# Allegro board interface.brd
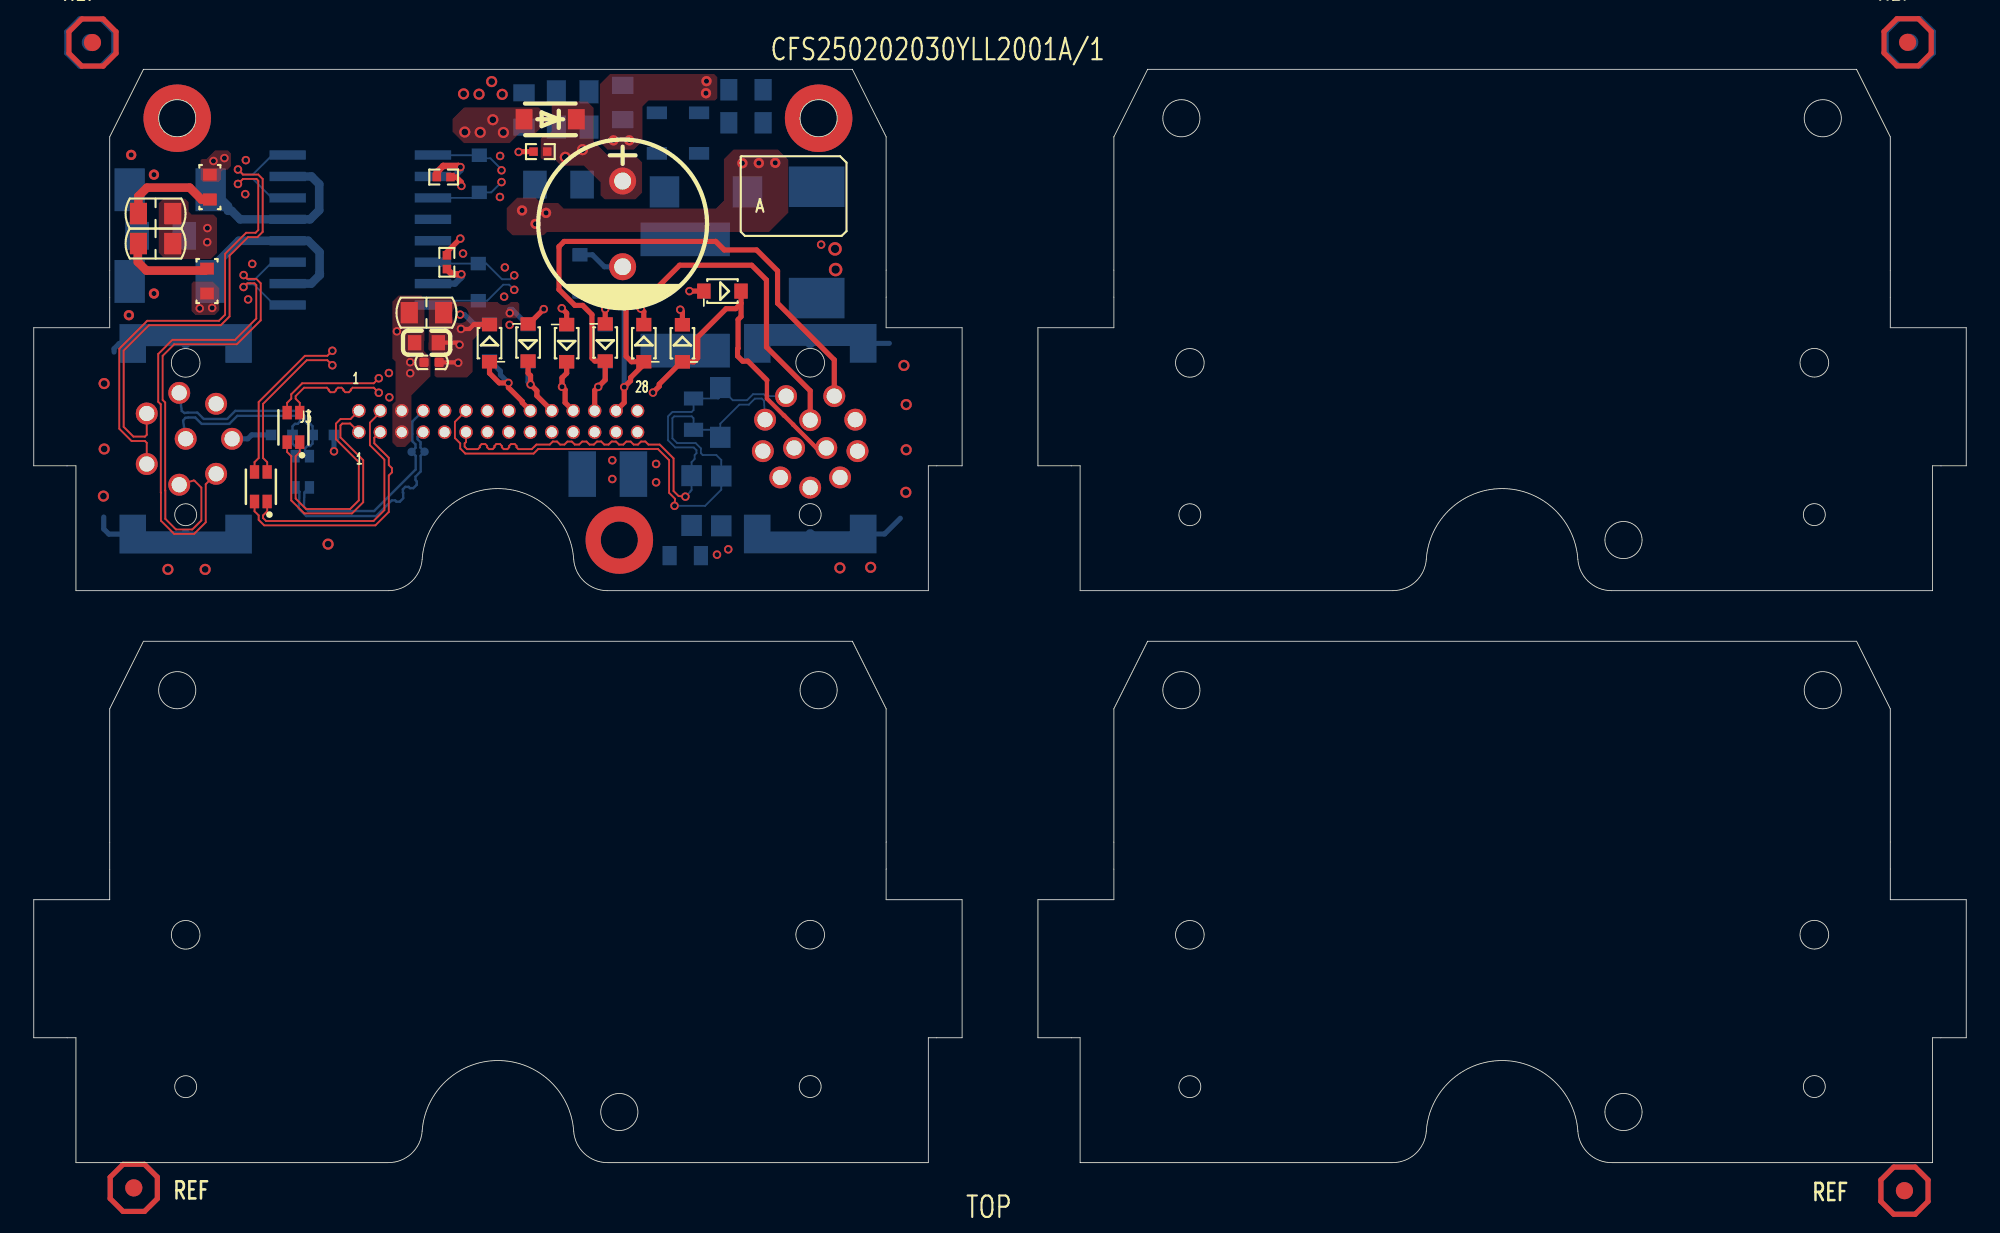
[diagram p0: board, top side]
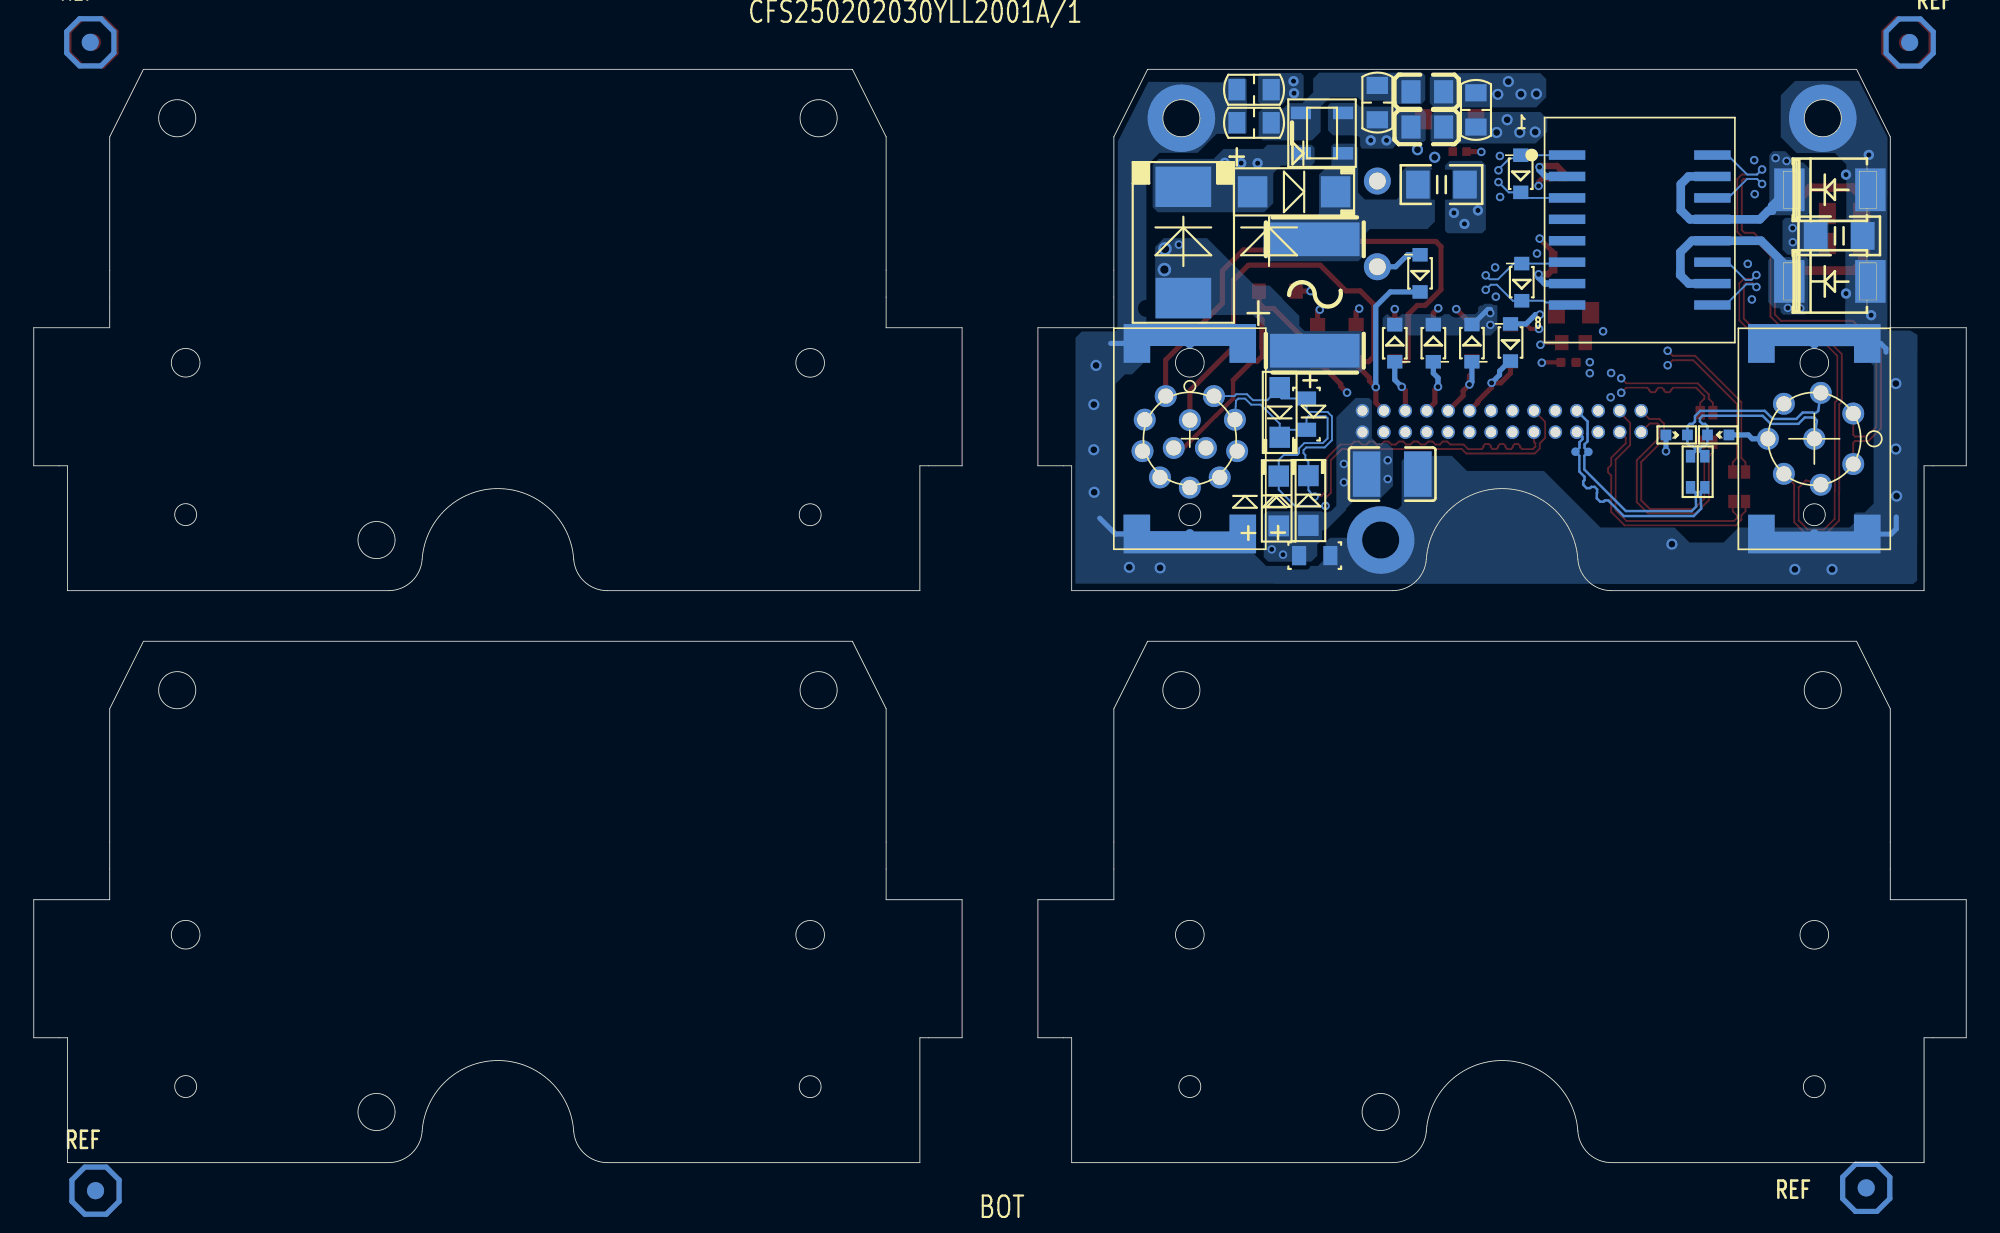
[diagram p1: board, bottom side, seen from below]

Outline 114.49 x 64.8 mm; copper layers: TOP, L2, L3, L4, L5, BOTTOM. Coordinates in mm from the lower left corner of the outline.
Outline path: circle c8.5,61.9 r1.1 ; circle c8.5,28 r1.1 ; circle c9,13.5 r0.85 ; circle c9,4.5 r0.65 ; circle c34.69,3 r1.1 ; circle c46,13.51 r0.85 ; circle c46,4.51 r0.65 ; circle c46.5,61.9 r1.1 ; circle c46.5,28 r1.1 ; circle c67.99,61.9 r1.1 ; circle c67.99,28 r1.1 ; circle c68.49,47.4 r0.85 ; circle c68.49,38.4 r0.65 ; circle c68.49,13.5 r0.85 ; circle c68.49,4.5 r0.65 ; circle c94.19,36.9 r1.1 ; circle c94.19,3 r1.1 ; circle c105.49,47.41 r0.85 ; circle c105.49,38.41 r0.65 ; circle c105.49,13.51 r0.85 ; circle c105.49,4.51 r0.65 ; circle c105.99,61.9 r1.1 ; circle c105.99,28 r1.1 ; 0,49.48 4.5,49.48 4.5,60.8 6.5,64.8 48.5,64.8 50.5,60.8 50.5,49.48 55,49.48 55,41.3 53,41.3 53,33.9 33.98,33.9 arc(32.62,34.44) 31.99,35.76 arc(27.5,39.95) 23.01,35.76 arc(22.38,34.44) 21.02,33.9 2.5,33.9 2.5,41.3 0,41.3 0,49.48 ; 0,15.58 4.5,15.58 4.5,26.9 6.5,30.9 48.5,30.9 50.5,26.9 50.5,15.58 55,15.58 55,7.4 53,7.4 53,0 33.98,0 arc(32.62,0.54) 31.99,1.86 arc(27.5,6.05) 23.01,1.86 arc(22.38,0.54) 21.02,0 2.5,0 2.5,7.4 0,7.4 0,15.58 ; 59.49,49.48 63.99,49.48 63.99,60.8 65.99,64.8 107.99,64.8 109.99,60.8 109.99,49.48 114.49,49.48 114.49,41.3 112.49,41.3 112.49,33.9 93.48,33.9 arc(92.11,34.44) 91.48,35.76 arc(86.99,39.95) 82.5,35.76 arc(81.87,34.44) 80.51,33.9 61.99,33.9 61.99,41.3 59.49,41.3 59.49,49.48 ; 59.49,15.58 63.99,15.58 63.99,26.9 65.99,30.9 107.99,30.9 109.99,26.9 109.99,15.58 114.49,15.58 114.49,7.4 112.49,7.4 112.49,0 93.48,0 arc(92.11,0.54) 91.48,1.86 arc(86.99,6.05) 82.5,1.86 arc(81.87,0.54) 80.51,0 61.99,0 61.99,7.4 59.49,7.4 59.49,15.58

## Design rules (mm)
constraint set DEFAULT: min track width 0.152, pair gap 0.127
net group GND_FIELD SIGNAL: nets N20727291 N20727344
net group MDI0+: nets MDI0+ MDI_A0+
net group MDI0-: nets MDI0- MDI_A0-
net group MDI1+: nets MDI1+ MDI_A1+
net group MDI1-: nets MDI1- MDI_A1-
net group OTG_DM: nets OTG_DM OTG_USB_DM_PORT
net group OTG_DP: nets OTG_DP OTG_USB_DP_PORT
net group ETH_CON1: nets MDI0+CON MDI0-CON MDI1+CON MDI1-CON
net group GIO: nets BJ_IN1 BJ_IN2 BJ_IN3 BJ_OUT1 BJ_OUT2 BJ_OUT3

## Placement (name value [footprint] x y rotation side)
C1  4.7uF/35V  [C0603]  23.27 48.6 180 top
C2  100nF  [C0402]  23.57 47.43 180 top
C3  22uF/35V  [C0805]  23.27 50.38 180 top
C4  1nF/2KV  [C1206]  7.52 54.93 0 bottom
C5  1nF  [C0805]  7.22 54.48 0 top
C6  1nF  [C0805]  7.22 56.25 0 top
C13  10uF/50V  [C1206]  31.09 57.97 180 bottom
C19  22uF/35V  [C0805]  29.05 62.39 90 bottom
C22  100nF  [SC0402]  24.28 58.41 0 top
C23  100nF  [SC0402]  24.48 53.37 90 top
C24  1nF/2KV  [C1210]  34.01 40.81 0 bottom
C30  22uF/35V  [C0805]  34.89 62.83 90 bottom
C31  1nF/1KV  [C0805]  42.2 63.59 0 bottom
C32  1nF/1KV  [C0805]  42.2 61.63 0 bottom
C33  100nF  [SC0402]  30.01 59.92 180 top
C35  220uF  [CAP-TH_BD10_0-P5_00-D1_0-FD]  34.89 55.64 270 top
D1  SD30CW  [SOD_323O]  33.86 48.61 270 top
D2  SD30CW  [SOD_323O]  32.36 52.71 270 bottom
D3  SD30CW  [SOD_323O]  40.8 51.66 0 top
D4  SD30CW  [SOD_323O]  29.29 48.61 270 top
D5  SD30CW  [SOD_323O]  27 48.61 270 bottom
D6  SD30CW  [SOD_323O]  31.57 48.57 270 top
D8  SD30CW  [SOD_323O]  33.86 48.56 90 bottom
D9  SD30CW  [SOD_323O]  36.14 48.57 90 top
D10  SD30CW  [SOD_323O]  38.43 48.56 90 top
D11  SD30CW  [SOD_323O]  27 48.57 90 top
D12  SD30CW  [SOD_323O]  29.29 48.57 90 bottom
D13  SD30CW  [SOD_323O]  31.57 48.57 90 bottom
ED1  BV-FA05UA  [ESD0402]  15.33 43.08 180 bottom
ED2  BV-FA05UA  [ESD0402]  16.52 43.18 0 bottom
ED3  SMA  [SOD_123]  40.67 44.47 90 bottom
ED4  SJD12C6.5L01  [SOD_123]  38.97 39.24 270 bottom
ED5  SJD12C6.5L01  [SOD_123]  40.73 39.22 270 bottom
F4  2920L300/36GR  [F2920]  38.59 51.43 90 bottom
FB1  SCM4015-102Y  [CMF_SCM4015_4_0X4_0]  38.17 61.02 90 bottom
FB2  SDCW2012-2-900TF  [D2012]  15.91 40.95 90 bottom
FB3  BTREF2012A3R601  [L0805]  31.93 61.38 180 bottom
FB4  BTREF2012A3R601  [L0805]  31.93 63.47 180 bottom
J3  GPEB241-1402A006C1BC  [HDR_TH_28P2X14_P1_27]  27.52 43.93 0 top
L2  SCM2012-121-04  [FILTER-SMD_4P-L2_0-W1_2-BL-1]  15.39 43.58 90 top
L3  SCM2012-121-04  [FILTER-SMD_4P-L2_0-W1_2-BL-1]  13.46 40.06 90 top
R3  75R  [SR0603]  10.27 52.25 90 top
R4  75R  [SR0603]  10.43 57.82 270 top
R16  120R/5%  [R0805]  39.09 44.36 90 bottom
R20  30MR  [R0805]  38.6 35.98 180 bottom
REF  -  [unnamed]  110.83 -1.66 0 top
REF#2  -  [unnamed]  3.48 66.39 0 top
REF#3  -  [unnamed]  5.93 -1.5 0 top
REF#4  -  [unnamed]  111.02 66.4 0 top
REF#5  -  [unnamed]  110.83 -1.66 180 bottom
REF#6  -  [unnamed]  5.93 -1.5 180 bottom
REF#7  -  [unnamed]  111.15 66.4 180 bottom
REF#8  -  [unnamed]  3.35 66.39 180 bottom
TP2  TP_0.5  [TP_0R50]  23.15 42.14 135 bottom
TP3  TP_0.5  [TP_0R50]  22.38 42.13 135 bottom
TV1  BTRTP0080TA  [SMBF]  8.08 52.23 0 bottom
TV2  BTRTP0080TA  [SMBF]  8.08 57.66 0 bottom
TV8  RBR1MM60ATR  [SOD-123FL]  30.6 61.84 180 top
TV9  BTR3S23Y08  [SOD_323O]  26.33 52.19 270 bottom
TV11  BTRSD33C302  [SMC]  46.38 54.54 270 bottom
TV12  BTRSA33C401  [SMA]  39.82 57.54 0 bottom
TV13  BTR3S23Y08  [SOD_323O]  26.4 58.61 270 bottom
U2  BT16A18  [MS10232]  19.34 55.27 180 bottom
U4  m12-thr-p12  [M12-THR-P12]  46 42.91 90 bottom
U5  m12-thr-s8  [M12-THR-S8]  9 42.9 270 bottom

## Library data of the parts
C1 = CAP NP: signal model: DEFAULT_CAPACITOR_4.7e+06pF_2_1
C2 C22 C23 = CAP NP: signal model: DEFAULT_CAPACITOR_100000pF_2_1
C3 = CAP NP: signal model: DEFAULT_CAPACITOR_2.2e+07pF_2_1
C4-C6 C24 = CAP NP: signal model: DEFAULT_CAPACITOR_1000pF_2_1
C13 C19 = CAP NP: signal model: DEFAULT_CAPACITOR_1e+07pF_2_1
C30-C33 = CAP NP
C35 = KM227M050G13RR0VH2FP0_C3
D1-D6 D8-D13 = DIODE_1: User Part Number: PARTNUM*; room: CHG
ED1-ED5 = DIODE BI_DIR TRIG
F4 = FUSE: signal model: DEFAULT_RESISTOR_2920.3OHM_2_1
FB1 = INDUCTOR COM_1
FB2 = INDUCTOR COM: signal model: INDUCTOR_COM_D2012_SDCW2012-2-900TF_SDCW2012-2-900TF
FB3 FB4 = Inductor
J3 = 5962-87786_0
L2 L3 = SCM2012-121-04_U1: signal model: SCM2012-121-04_SCM2012-121-04
R3 R4 = RESISTOR: signal model: DEFAULT_RESISTOR_75.000000OHM_2_1
R16 = RESISTER: signal model: DEFAULT_RESISTOR_120.000000OHM_2_1
R20 = RESISTOR
TP2 TP3 = TP
TV1 TV2 TV11 TV12 = TVS_S
TV8 = DIODE TVS_0
TV9 TV13 = TVS_S: User Part Number: PARTNUM*
U2 = LAN1102: User Part Number: PARTNUM*
U4 = JK_CON2_2
U5 = JK_CON3_0

## Footprints (pads in the part's own frame, mm; a bottom-side part is the same pattern mirrored in y, then rotated)
C0402
  custom 0.55x0.55 smd: 1(-0.45,0) 2(0.45,0)
C0603
  rect 0.8x0.9 smd: 1(-0.7,0) 2(0.7,0)
C0805
  rect 1.016x1.27 smd: 1(-1.016,0) 2(1.016,0)
C1206
  rect 1.397x1.651 smd: 1(-1.397,0) 2(1.397,0)
C1210
  rect 1.635x2.7 smd: 1(-1.517,0) 2(1.517,0)
CAP-TH_BD10_0-P5_00-D1_0-FD
  round 1.6 hole 1: 1(-2.54,0) 2(2.54,0)
CMF_SCM4015_4_0X4_0
  rect 0.75x1.2 smd: 1(-1.2,1.25) 2(1.2,1.25) 3(1.2,-1.25) 4(-1.2,-1.25)
D2012
  rect 0.749x0.549 smd: 1(-0.925,-0.424) 2(0.925,-0.424) 3(-0.925,0.424) 4(0.925,0.424)
ESD0402
  rect 0.635x0.635 smd: 1(0,0.051) 2(1.27,0.051)
F2920
  rect 2x5.3 smd: 1(-3.3,0) 2(3.3,0)
FILTER-SMD_4P-L2_0-W1_2-BL-1
  rect 0.8x0.55 smd: 1(-0.875,-0.375) 2(0.875,-0.375) 3(0.875,0.375) 4(-0.875,0.375)
HDR_TH_28P2X14_P1_27
  round 0.8 hole 0.6: 1(-8.255,-0.635) 2(-8.255,0.635) 3(-6.985,-0.635) 4(-6.985,0.635) 5(-5.715,-0.635) 6(-5.715,0.635) 7(-4.445,-0.635) 8(-4.445,0.635) 9(-3.175,-0.635) 10(-3.175,0.635) 11(-1.905,-0.635) 12(-1.905,0.635) 13(-0.635,-0.635) 14(-0.635,0.635) 15(0.635,-0.635) 16(0.635,0.635) 17(1.905,-0.635) 18(1.905,0.635) 19(3.175,-0.635) 20(3.175,0.635) 21(4.445,-0.635) 22(4.445,0.635) 23(5.715,-0.635) 24(5.715,0.635) 25(6.985,-0.635) 26(6.985,0.635) 27(8.255,-0.635) 28(8.255,0.635)
L0805
  rect 1.133x1.377 smd: 1(-0.966,0) 2(0.966,0)
M12-THR-P12
  round 1.3 hole 0.9: 1(2.524,-1.428) 2(2.524,1.428) 3(1.127,2.672) 4(-0.738,2.804) 5(-2.297,1.77) 6(-2.9,0) 7(-2.297,-1.77) 8(-0.738,-2.804) 9(1.127,-2.672) 10(1.1,0) 11(-0.55,0.953) 12(-0.55,-0.953)
  custom 2.3x7.852 smd: 13(-5.649,0.001)
  custom 2.3x7.848 smd: 14(5.649,0.001)
M12-THR-S8
  round 1.3 hole 0.9: 1(-1.498,2.306) 2(1.497,2.306) 3(2.723,0.383) 4(2.076,-1.804) 5(0,-2.75) 6(-2.075,-1.804) 7(-2.723,0.382) 8(0,0)
  custom 2.3x7.852 smd: 9(-5.649,0.001)
  custom 2.3x7.848 smd: 10(5.648,0)
MS10232
  rect 2.159x0.559 smd: 1(-4.305,4.445) 2(-4.305,3.175) 3(-4.305,1.905) 4(-4.305,0.635) 5(-4.305,-0.635) 6(-4.305,-1.905) 7(-4.305,-3.175) 8(-4.305,-4.445) 9(4.305,-4.445) 10(4.305,-3.175) 11(4.305,-1.905) 12(4.305,-0.635) 13(4.305,0.635) 14(4.305,1.905) 15(4.305,3.175) 16(4.305,4.445)
R0805
  rect 0.838x1.143 smd: 1(-0.927,0) 2(0.927,0)
SC0402
  rect 0.508x0.508 smd: 1(-0.406,0) 2(0.406,0)
SMA
  rect 1.75x1.849 smd: 1(2.458,0) 2(-2.458,0)
SMBF
  rect 1.801x2.54 smd: 1(-2.4,0) 2(2.4,0)
SMC
  rect 2.4x3.3 smd: 1(-3.3,0) 2(3.3,0)
SOD-123FL
  rect 1x1.2 smd: 1(-1.55,0) 2(1.55,0)
SOD_123
  rect 1.25x1.22 smd: 1(-1.475,0) 2(1.475,0)
SOD_323O
  rect 0.8x0.899 smd: 1(-1.1,0) 2(1.1,0)
SR0603
  rect 0.711x0.813 smd: 1(0.737,0) 2(-0.737,0)
TP_0R50
  round 0.5 smd: 1(0,0)
unnamed
  round 1.016 smd: (0,0)

## Nets
GND: C1.2 C2.2 C3.2 C19.2 C22.2 C23.2 C24.2 C33.2 C35.2 D1.1 D2.1 D3.1 D4.1 D5.1 D6.1 ED1.2 ED2.2 ED4.2 ED5.2 FB4.2 J3.5 J3.6 J3.9 J3.10 J3.17 J3.19 J3.21 J3.23 J3.27 J3.28 R20.1 U5.5 U5.6
GND_FIELD SIGNAL: C4.1 C24.1 C31.2 C32.2 R20.2 TV1.1 TV2.1 U4.13 U4.14 U5.9 U5.10
GND_SIGNAL: C13.2 FB1.1 TV11.1 TV12.1 U4.12
VCC_IN: F4.1 TV11.2 U4.8
VCC_IN1: C1.1 C2.1 C3.1 C33.1 C35.1 D8.2(K) D9.2(K) D10.2(K) D11.2(K) D12.2(K) D13.2(K) J3.13 J3.14 J3.15 J3.16 TV8.1(CATHODE)
VCC_ON: C13.1 F4.2 FB1.4 TV12.2
BJ_IN1: D1.2(K) D8.1 J3.24 U4.2
BJ_IN2: D2.2(K) D9.1 J3.26 U4.10
BJ_IN3: D3.2(K) D10.1 J3.25 U4.11
BJ_OUT1: D5.2(K) D11.1 J3.18 U4.7
BJ_OUT2: D4.2(K) D12.1 J3.20 U4.6
BJ_OUT3: D6.2(K) D13.1 J3.22 U4.5
MDI0+: J3.3 L3.4
MDI0+CON: U2.16 U5.1
MDI0-: J3.4 L3.1
MDI0-CON: U2.14 U5.2
MDI1+: J3.1 L2.4
MDI1+CON: U2.11 U5.3
MDI1-: J3.2 L2.1
MDI1-CON: U2.9 U5.4
MDI_A0+: L3.3 TV13.1 U2.1
MDI_A0-: L3.2 TV13.2 U2.3
MDI_A1+: L2.3 TV9.1 U2.6
MDI_A1-: L2.2 TV9.2 U2.8
OTG_DM: FB2.3 J3.8 TP3.1
OTG_DP: FB2.1 J3.7 TP2.1
OTG_USB_DM_PORT: ED2.1 FB2.4 U5.7
OTG_USB_DP_PORT: ED1.1 FB2.2 U5.8
RS485-A: ED3.2 ED4.1 J3.11 R16.2 U4.1
RS485-B: ED3.1 ED5.1 J3.12 R16.1 U4.9
N20143445: R3.2 TV1.2 U2.10 U2.12
N20299843: R4.2 TV2.2 U2.13 U2.15
N20726908: C22.1 U2.2
N20726913: C23.1 U2.7
N20727277: C4.2 C5.2 C6.2
N20727291: C6.1 R4.1
N20727344: C5.1 R3.1
N20773616: C30.1 C31.1 FB1.3(4) FB3.1
N20773758: C30.2 C32.1 FB1.2 FB4.1
N20839386: C19.1 FB3.2 TV8.2

Pads without a net: U2 4 5; U4 3 4

## Via types
v1: diameter 0.66, hole 0.406, TOP to BOTTOM, 22 vias
v2: diameter 0.61, hole 0.305, TOP to BOTTOM, 14 vias
v3: diameter 0.5, hole 0.3, TOP to BOTTOM, 65 vias
v4: diameter 4, hole 2.2, TOP to BOTTOM, 3 vias
v5: diameter 0.8, hole 0.5, TOP to BOTTOM, 2 vias

## Routing (per net, layer and track width the routed paths; a pad name or vN(x,y) marks a point on that pad's centre or on a via; arc(x,y) is an arc through that point)
GND: length 21.2
  TOP w0.305: D3.1 v3(38.85,51.66) ; C33.2 28.75,59.92 v3(28.73,59.9) ; D4.1 29.34,49.71 v3(30.22,50.59) ; v3(25.27,54.77) 24.48,53.97 C23.2 ; D1.1 v3(33.86,50.59) ; D6.1 31.57,50.35 v3(31.28,50.64) ; C22.2 25.03,58.41 25.34,58.11 v3(25.34,57.89)
  L5 w0.61: U5.6 13.25,44.98 13.25,43.51 12.64,42.9 U5.5
  BOTTOM w0.305: ED2.2 17.79,43.13 v3(17.79,42.16) ; U5.5 12.68,42.9 12.91,43.13 ED1.2 ; v3(25.26,50.26) 25.53,50.26 26.08,49.71 D5.1 ; D2.1 33.1,53.81 33.81,53.1 C35.2
  vias: v1(25.47,63.34) v1(26.38,63.33) v1(27.13,64.07) v1(27.75,63.32) v3(21.04,46.8) v3(21.07,45.36) v3(21.52,49.27) v3(22.3,47.44) v3(22.3,46.79) v3(25.43,53.88) v3(27.63,59.67) v3(27.62,57.23) v3(27.91,53.06) v3(27.87,51.32) v3(34.28,41.63) v3(34.28,40.52) v3(36.87,41.41) v3(36.87,40.32) v3(40.48,36.03) v3(41.15,36.35)
GND_FIELD SIGNAL: length 21.8
  BOTTOM w0.152: 7.92,48.88 7.92,48.7
  BOTTOM w0.305: v1(4.17,46.18) 4.17,46.17 ; U4.13 50.41,37.26 51.34,38.19 ; 4.76,48.04 4.76,48.25 5.06,48.55 U5.9 ; U4.14 50.69,48.56 ; U5.10 4.45,37.25 4.15,37.56 4.15,38.27
  BOTTOM w0.457: 34.71,36 34.71,36.88 v4(34.69,36.9)
  vias: v1(4.13,39.51) v1(4.17,42.3) v1(7.95,35.16) v1(10.16,35.16) v1(17.44,36.66) v1(47.76,35.25) v1(49.58,35.28) v1(51.55,47.25) v1(51.69,44.93) v1(51.69,42.25) v1(51.67,39.73) v2(5.64,50.23) v2(5.77,59.73) v2(7.12,58.56) v2(7.12,51.51) v3(12.53,57.4) v3(12.56,59.42) v3(12.7,51.16) v3(12.94,53.27) v4(8.5,61.9) v4(46.5,61.9)
GND_SIGNAL: length 6.4
  L5 w0.203: 43.88,43.14 42.72,43.14 ; 44.96,42.36 44.75,42.56 44.75,43.12 ; 43.27,41.03 43.42,41.19 43.56,41.19 44.09,41.72 44.36,41.72 ; U4.12 45.7,42.36
  L5 w0.254: 42.09,41.15 43.15,41.15 43.27,41.03
  L5 w0.305: U4.12 44.67,42.36 44.36,42.05 44.36,41.72
  vias: v2(28.93,56.44) v2(29.73,55.64) v2(30.35,56.29) v2(41.98,59.24) v2(42.96,59.24) v2(43.93,59.26)
VCC_IN:
  vias: v3(46.65,54.41) v5(47.47,54.16) v5(47.51,52.93)
VCC_IN1: length 21.6
  TOP w0.254: v3(25.31,49.41) 25.81,49.41 26.07,49.67 ; C2.1 25.13,47.43 v3(25.15,47.41) ; C1.1 25.1,48.6 v3(25.23,48.48)
  TOP w0.305: v3(35.97,50.62) 36.14,50.44 D9.2 ; D10.2 38.43,50.42 v3(38.3,50.55) ; 26.07,49.67 D11.2
  L4 w0.203: 23.7,45.44 23.9,45.64 25.01,45.64 ; 23.7,45.44 23.7,44.23 23.7,44.22 23.7,43.96 ; 23.7,45.44 22.94,45.44 22.8,45.3 22.66,45.3 22.46,45.1 22.46,45.02 22.45,45.01 22.45,44.16 22.65,43.96 23.7,43.96 ; 23.7,43.96 24.85,43.96 24.85,43.96 25.12,43.96 25.15,43.98 25.19,43.98 ; 25.01,45.64 25.15,45.79 25.15,47.44 ; 25.01,45.64 25.01,44.89 24.99,44.88 24.99,44.29 24.98,44.29 24.98,44.11 25.06,44.11 25.19,43.98 ; 25.19,43.98 25.2,43.97 25.35,43.97 25.36,43.96 26.09,43.96 26.31,43.74 26.44,43.74 J3.13
  BOTTOM w0.305: v3(28.2,50.35) 28.19,50.35 28.19,50.55 28.2,50.57 28.34,50.57 29.24,49.67 D12.2
  vias: v1(31.49,59.59) v1(32.51,60.04) v3(28.19,49.65)
BJ_IN1: length 36
  TOP w0.305: J3.24 33.23,45.77 v3(33.44,45.98) 33.86,46.4 D1.2 33.24,47.51 33.07,47.68 33.07,50.26 32.52,50.81 32.06,50.81 31.12,51.75 31.12,54.29 31.42,54.6 40.41,54.6 40.91,54.09 42.83,54.09 44.07,52.85 44.07,50.94 47.43,47.58 U4.2
  BOTTOM w0.305: v3(33.44,45.98) 33.86,46.4 D8.1
BJ_IN2: length 34.8
  TOP w0.305: U4.10 46,45.75 43.41,48.34 43.41,52.31 42.53,53.19 38.27,53.19 36.75,51.67 35.9,51.67 35.09,50.86 35.09,47.79 35.41,47.47 D9.1 36.3,47.47 35.36,46.52 35.36,46.34 v3(34.98,45.96) 34.98,45.05 J3.26
  BOTTOM w0.305: D2.2 34.12,51.61 34.98,50.75 v3(34.98,45.96)
BJ_IN3: length 25.7
  TOP w0.254: 43.44,46.37 43.44,45.29 44.45,44.28 44.46,44.28 45,43.74 45,43.73 46.37,42.36 U4.11
  TOP w0.305: D3.2 41.9,50.93 ; 41.9,50.93 41.59,50.61 41.02,50.61 39.33,48.93 39.33,47.69 39.11,47.46 D10.1 38.38,47.46 37.06,46.14 37.06,46.02 v3(36.68,45.64) ; 41.9,50.93 41.9,50.14 41.73,49.96 41.73,48.27 41.7,48.24 41.7,47.81 42,47.5 42.31,47.5 43.44,46.37
  L3 w0.305: J3.25 35.26,42.54 36.39,42.54 36.68,42.84 v3(36.68,45.64)
BJ_OUT1: length 35.5
  TOP w0.305: J3.18 28.94,45.05 28.94,45.12 28.12,45.94 v3(28.12,46.21) 27.58,46.21 27,46.79 D11.1
  L3 w0.254: 36.72,51.32 37.22,50.82 37.22,50.27 37.57,49.92 40.79,49.92 41.88,48.83
  L3 w0.305: 36.72,51.32 29.54,51.32 28.89,50.67 28.89,46.98 28.59,46.68 v3(28.12,46.21) ; 41.88,48.83 41.88,41.39 42.66,40.61 U4.7
  BOTTOM w0.305: v3(28.12,46.21) 27.65,46.69 27.65,46.91 27.05,47.51 D5.2
BJ_OUT2: length 32.9
  TOP w0.305: J3.20 29.81,45.45 29.81,45.74 v3(29.43,46.12) 29.43,46.65 29.29,46.79 D4.2
  L3 w0.305: U4.6 45.05,39.06 44.08,39.06 43.77,38.75 43.77,38.23 43.47,37.92 41.45,37.92 40.75,38.62 40.75,46.37 39.59,47.53 31.06,47.53 30.45,46.92 30.45,45.48 30.69,45.25 J3.20
  BOTTOM w0.305: v3(29.43,46.12) 29.29,46.26 D12.1
BJ_OUT3: length 32.6
  TOP w0.305: D6.2 31.57,46.79 31.3,46.51 v3(31.3,45.98) 31.48,45.8 31.48,45.05 J3.22
  L3 w0.305: U4.5 47.77,38.72 47.19,38.14 47.19,37.29 46.88,36.98 40.62,36.98 39.39,38.21 39.39,42.06 37.84,43.61 37.84,45.69 36.8,46.73 31.52,46.73 31.3,46.51 v3(31.3,45.98)
  BOTTOM w0.305: v3(31.3,45.98) 31.3,46.51 31.57,46.79 D6.2
MDI0+: length 14.8
  TOP w0.109: L3.4 13.08,38.6 13.32,38.36 13.32,38.1 13.65,37.77 20.24,37.77 21.03,38.57 21.03,40.72 21.22,40.91 21.22,41.16 21.03,41.35 21.03,41.77 20.18,42.63 20.18,42.97 20.51,43.3 J3.3
MDI0+CON: length 29.1
  TOP w0.109: v3(12.1,58.86) 12.4,58.56 13.3,58.56 13.56,58.3 13.56,55.17 13.25,54.85 12.69,54.85 11.6,53.76 11.6,50.15 11.08,49.63 6.83,49.63 5.33,48.13 5.33,43.61 5.9,43.03 6.59,43.03 6.69,43.14 U5.1
  BOTTOM w0.109: v3(12.1,58.86) 12.4,58.57 12.98,58.57 14.13,59.72 U2.16
MDI0-: length 15.1
  TOP w0.109: J3.4 20.53,44.47 19.92,43.86 19.92,42.52 20.77,41.67 20.77,38.67 20.13,38.03 13.76,38.03 13.59,38.21 13.59,38.36 13.83,38.6 L3.1
MDI0-CON: length 29.1
  TOP w0.109: U5.2 6.69,42.66 6.59,42.77 5.8,42.77 5.07,43.5 5.07,48.24 6.72,49.89 10.97,49.89 11.34,50.26 11.34,53.87 12.58,55.11 13.14,55.11 13.3,55.28 13.3,58.19 13.19,58.3 12.39,58.3 v3(12.1,58.01)
  BOTTOM w0.109: U2.14 14.1,57.18 12.98,58.3 12.4,58.3 v3(12.1,58.01)
MDI1+: length 14.9
  TOP w0.109: L2.4 15.01,42.12 15.25,41.88 15.25,39.25 16.02,38.48 18.85,38.48 19.52,39.14 19.52,41.63 19.33,41.82 19.33,41.82 18.17,42.98 18.17,43.69 18.29,43.81 18.75,43.81 J3.1
MDI1+CON: length 29.1
  TOP w0.109: U5.3 9.48,40.43 9.53,40.41 9.93,40.01 9.93,38.06 9.39,37.53 8.43,37.53 7.79,38.16 7.79,39.83 7.79,39.83 7.79,45.05 7.64,45.2 7.64,47.82 8.32,48.51 12.03,48.51 13.45,49.92 13.45,52.12 13.18,52.38 12.81,52.38 12.66,52.38 v3(12.43,52.61)
  BOTTOM w0.109: v3(12.43,52.61) 12.72,52.32 13.07,52.32 14.12,53.37 U2.11
MDI1-: length 14.4
  TOP w0.109: J3.2 18.77,44.07 18.17,44.07 17.9,43.8 17.9,42.87 19.15,41.63 19.15,41.63 19.26,41.52 19.26,39.25 18.75,38.74 16.13,38.74 15.52,39.36 15.52,41.88 15.76,42.12 L2.1
MDI1-CON: length 29.1
  TOP w0.109: v3(12.43,51.9) 12.65,52.12 12.81,52.12 13.08,52.12 13.18,52.01 13.18,50.03 11.92,48.77 8.22,48.77 7.38,47.93 7.38,45.1 7.53,44.95 7.53,39.73 7.53,39.72 7.53,38.05 8.32,37.27 9.5,37.27 10.19,37.95 10.19,40.21 U5.4
  BOTTOM w0.109: U2.9 14.26,50.83 13.03,52.06 12.64,52.06 12.48,51.9 v3(12.43,51.9)
MDI_A0+: length 31.9
  TOP w0.109: L3.3 13.08,41.52 13.32,41.76 13.32,45.08 16.07,47.82 17.39,47.82 v3(17.69,48.12)
  L3 w0.109: v3(17.69,48.12) 17.99,47.82 21.17,47.82 22.78,49.43 22.78,54.33 27.07,58.62 27.52,58.62 v3(27.71,58.81)
  BOTTOM w0.109: U2.1 23.66,59.71 TV13.1 26.58,59.53 27.05,59.53 27.71,58.87 v3(27.71,58.81)
MDI_A0-: length 31.5
  TOP w0.109: L3.2 13.83,41.52 13.59,41.76 13.59,44.97 16.17,47.56 17.39,47.56 v3(17.69,47.26)
  L3 w0.109: v3(27.71,58.12) 27.71,58.13 27.49,58.35 27.18,58.35 23.04,54.22 23.04,49.32 21.28,47.56 17.99,47.56 v3(17.69,47.26)
  BOTTOM w0.109: TV13.2 26.07,57.18 U2.3
  BOTTOM w0.114: v3(27.71,58.12) 27.1,57.51 TV13.2
MDI_A1+: length 31.8
  TOP w0.109: v3(20.44,46.49) 20.14,46.19 15.91,46.19 15.26,45.54 15.26,45.28 15.01,45.03 L2.3
  L3 w0.109: v3(20.44,46.49) 20.74,46.19 22.37,46.19 23.63,47.46 23.63,51.08 23.96,51.41 26.04,51.41 26.27,51.65 26.27,54.81 26.66,55.2 27.62,55.2 28.12,54.7 28.12,53.96 27.75,53.6 27.46,53.6 27.29,53.43 27.29,52.68 27.64,52.33 28.2,52.33 v3(28.47,52.59)
  BOTTOM w0.109: v3(28.47,52.59) 28.24,52.36 27.74,52.36 26.81,53.29 TV9.1 23.73,53.29 U2.6
MDI_A1-: length 32.1
  TOP w0.109: v3(20.44,45.63) 20.14,45.93 18.89,45.93 18.78,45.82 18.78,45.77 18.67,45.66 18.46,45.66 18.35,45.77 18.35,45.82 18.24,45.93 18.02,45.93 17.91,45.82 17.91,45.77 17.8,45.66 17.58,45.66 17.48,45.77 17.48,45.82 17.37,45.93 16.01,45.93 15.52,45.43 15.52,45.28 15.76,45.03 L2.2
  L3 w0.109: v3(20.44,45.63) 20.74,45.93 22.48,45.93 23.9,47.35 23.9,50.97 24.07,51.14 26.15,51.14 26.54,51.54 26.54,54.7 26.77,54.94 27.51,54.94 27.86,54.59 27.86,54.07 27.64,53.86 27.35,53.86 27.02,53.54 27.02,52.57 27.53,52.06 28.24,52.06 28.47,51.83 v3(28.47,51.73)
  BOTTOM w0.109: v3(28.47,51.73) 28.16,52.03 27.81,52.03 26.87,51.09 TV9.2 25.01,51.09 24.9,50.98 23.76,50.98 23.65,50.87 U2.8
OTG_DM: length 13
  BOTTOM w0.142: FB2.3 16.04,39.72 16,38.88 16.26,38.62 20.16,38.62 22.63,41.08 22.63,41.89 22.62,41.89 TP3.1 22.61,42.36 22.61,42.58 22.43,42.75 22.43,43.93 J3.8
OTG_DP: length 13.5
  BOTTOM w0.142: FB2.1 15.74,39.76 15.72,39.05 15.71,38.76 16.14,38.32 20.28,38.32 21.21,39.25 21.41,39.25 21.49,39.17 21.69,39.17 21.89,39.37 21.89,39.69 21.87,39.71 21.87,39.91 22.01,40.05 22.21,40.05 22.29,39.98 22.49,39.98 22.69,40.18 22.69,40.38 22.62,40.45 22.62,40.66 22.92,40.96 22.92,41.9 TP2.1 22.92,42.36 22.91,42.58 22.91,42.7 22.74,42.88 22.74,43.03 22.89,43.18 22.96,43.18 J3.7
OTG_USB_DM_PORT: length 12
  BOTTOM w0.142: FB2.4 16.08,42.13 16.07,42.13 16.07,42.33 16.21,42.47 16.38,42.47 16.52,42.61 ED2.1 16.52,43.65 16.38,43.79 16.21,43.79 16.07,43.93 16.07,44.24 15.76,44.56 11.94,44.56 11.46,44.08 10.07,44.08 9.69,44.46 9.13,44.46 8.93,44.43 8.77,44.55 U5.7
OTG_USB_DP_PORT: length 11.5
  BOTTOM w0.142: FB2.2 15.75,42.13 15.78,42.13 15.78,42.33 15.64,42.47 15.47,42.47 15.33,42.61 ED1.1 15.33,43.65 15.47,43.79 15.64,43.79 15.78,43.93 15.78,44.12 15.64,44.26 12.06,44.26 11.58,43.79 9.95,43.79 9.57,44.16 9.15,44.16 8.97,44.14 8.85,43.98 U5.8
RS485-A: length 33.9
  TOP w0.109: J3.11 25.61,42.71 25.53,42.63 25.53,42.44 25.68,42.29 26.32,42.29 26.42,42.4 26.42,42.48 26.53,42.59 26.75,42.59 26.86,42.48 26.86,42.4 26.97,42.29 27.19,42.29 27.3,42.4 27.3,42.48 27.41,42.59 27.62,42.59 27.73,42.48 27.73,42.4 27.84,42.29 28.06,42.29 28.17,42.4 28.17,42.48 28.28,42.59 28.5,42.59 28.6,42.48 28.6,42.4 28.71,42.29 29.51,42.29 29.78,42.56 30.57,42.56 30.75,42.74 31.01,42.74 31.18,42.56 31.44,42.56 31.62,42.74 31.88,42.74 32.06,42.56 32.31,42.56 32.49,42.74 32.75,42.74 32.93,42.56 33.18,42.56 33.36,42.74 33.62,42.74 33.8,42.56 34.06,42.56 34.24,42.74 34.49,42.74 34.67,42.56 34.93,42.56 35.11,42.74 35.36,42.74 35.54,42.56 35.8,42.56 35.98,42.74 36.24,42.74 36.41,42.56 37.09,42.56 37.9,41.74 37.9,39.81 38.2,39.51 v3(38.61,39.47)
  BOTTOM w0.109: 40.67,45.93 ED3.2 ; 40.67,45.93 40.67,45.4 40.57,45.29 R16.2 39.09,44.6 38.98,44.49 37.84,44.49 37.58,44.23 37.58,42.82 38.01,42.39 39.11,42.39 39.26,42.23 39.26,42.05 39.16,41.94 39.16,41.7 38.97,41.52 ED4.1 38.97,39.87 38.91,39.81 38.91,39.78 v3(38.61,39.47) ; 40.67,45.93 41.41,45.19 42.26,45.19 42.62,45.55 43.24,45.55 43.36,45.43 43.36,45.43 U4.1
RS485-B: length 37
  TOP w0.109: J3.12 24.95,43.9 24.95,42.94 25.27,42.63 25.27,42.33 25.57,42.03 29.62,42.03 29.89,42.3 36.98,42.3 37.64,41.63 37.64,39.7 38,39.34 38,39.34 v3(37.96,38.93)
  BOTTOM w0.109: 40.67,43.33 40.67,43.8 41.8,44.93 42.37,44.93 42.72,45.28 43.14,45.28 43.26,45.16 U4.9 ; 40.67,43.33 ED3.1 ; 40.67,43.33 40.57,43.44 R16.1 39.09,44.12 38.98,44.23 37.95,44.23 37.84,44.12 37.84,42.93 38.12,42.65 39.21,42.65 39.52,42.34 39.52,42.05 39.63,41.94 40.44,41.94 40.73,41.65 ED5.1 40.73,39.89 39.78,38.93 v3(37.96,38.93)
N20143445: length 11.6
  BOTTOM w0.508: TV1.2 10.48,52.97 12.15,54.64 U2.12 16.26,54.64 16.93,53.96 16.93,52.73 16.95,52.71 16.95,52.61 16.44,52.1 U2.10
  vias: v3(9.83,50.63) v3(10.57,50.66)
N20299843: length 11.1
  BOTTOM w0.508: U2.15 16.45,58.45 16.91,57.99 16.91,56.45 16.37,55.91 U2.13 12.23,55.91 11.72,56.42 11.51,56.42 11.51,56.69 10.54,57.66 TV2.2
  vias: v3(10.65,59.37) v3(11.3,59.54)
N20726908: length 3.8
  TOP w0.381: v3(25.28,59.01) 25.22,59.01 25.15,59.07 24.26,59.07 23.88,58.69 C22.1
  BOTTOM w0.381: v3(25.28,59.01) 25.28,58.83 24.9,58.45 U2.2
N20726913: length 3
  TOP w0.381: C23.1 24.79,52.65 v3(25.33,52.65)
  BOTTOM w0.381: U2.7 24.95,52.1 25.33,52.48 v3(25.33,52.65)
N20727277:
  vias: v3(10.29,55.39) v3(10.28,54.55)
N20727291: length 5.8
  TOP w0.508: C6.1 6.2,57.28 6.71,57.79 9.24,57.79 9.94,57.08 R4.1
N20727344: length 5.5
  TOP w0.508: R3.1 10.15,52.87 6.67,52.87 6.17,53.38 6.17,54.44 C5.1
N20773616:
  vias: v2(34.35,60.59) v2(35.28,60.59) v2(39.86,64.1) v2(39.83,63.38)
N20839386:
  vias: v1(25.54,61.08) v1(26.45,61.07) v1(27.2,61.81) v1(27.82,61.06)

## Copper pours and planes (outline as drawn; the poured copper is in the pictures)
GND on TOP: 21.61,51.39 22.97,51.39 23.14,51.21 23.14,48.7 23.12,48.68 23.12,48.09 23.4,47.82 23.47,47.82 23.5,47.79 23.5,46.61 22.37,45.48 22.37,42.79 22,42.41 21.51,42.41 21.25,42.67 21.25,44.94 21.44,45.13 21.44,47.47 21.24,47.66 21.24,51.02
GND on BOTTOM: 25.48,62.55 31.52,62.55 31.78,62.81 31.78,64.31 31.52,64.57 25.23,64.57 24.89,64.22 24.89,63.14
GND on BOTTOM: 35.37,45.31 36.19,45.31 37.31,44.19 37.31,38.94 37.65,38.6 41.45,38.6 41.62,38.43 41.62,35.88 41.31,35.57 38.85,35.57 38.45,35.97 38.45,36.58 38.47,36.6 38.47,36.61 38.16,36.93 38.16,37.45 38.12,37.49 37.93,37.49 36.74,38.68 36.74,38.76 36.21,39.29 34.78,39.29 33.96,40.11 33.96,42.31 34.3,42.64 34.91,42.64 35.22,42.95 35.22,45.17
GND on L2, L5: 37.35,58.62 39.32,58.62 39.49,58.46 39.98,58.46 41.11,57.33 41.11,52.14 39.56,50.58 39.56,40.73 39.86,40.38 40.16,40.09 42.04,40.09 42.43,39.7 42.43,38.77 42.31,38.65 40.59,38.65 40.31,38.36 40.31,35.86 40.13,35.68 39.09,35.68 38.92,35.85 38.92,36.76 38.5,37.19 37.75,37.19 35.75,39.19 34.89,39.19 33.93,40.14 33.93,41.08 33.73,41.29 24.88,41.29 21.4,37.8 16.68,37.8 16.15,37.27 14.47,37.27 14.19,37.55 13.52,37.55 12.98,38.09 12.98,41.61 12.77,41.83 8.93,41.83 8.38,42.37 8.38,44.87 7.9,45.35 7.9,46.57 7.97,46.64 12.87,46.64 13.45,47.22 13.45,48.77 14.04,49.36 21.41,49.36 21.75,49.7 21.75,62.71 23.53,64.49 33.66,64.49 33.88,64.27 33.88,62.67 34.13,62.41 34.62,62.41 34.63,62.43 34.71,62.35 34.71,59.19 35.28,58.61 37.34,58.61 ; 1 cut-out
GND_FIELD SIGNAL on BOTTOM: 42.78,64.32 43.8,64.32 44.1,64.02 48.46,64.06 50.26,60.54 50.28,49.4 50.44,49.26 52.41,49.26 52.77,48.88 52.77,41.51 52.78,41.5 52.78,34.32 3.16,34.29 2.91,34.5 2.89,49.07 3.35,49.32 4.6,49.32 4.68,49.35 4.68,50.26 4.66,60.77 6.35,64.12 10.14,64.11 10.99,63.27 10.99,60.78 10.04,59.84 7.79,59.84 7.1,59.15 7.1,55.82 6.89,55.82 6.89,54.04 7.16,54.04 7.16,50.9 7.17,50.9 7.17,49.49 9.53,49.49 9.83,49.19 9.83,48.68 9.78,48.63 6.89,48.63 5.49,47.22 5.49,39.07 6.02,38.53 6.55,38.53 6.66,38.42 6.66,37.9 6.91,37.64 13.49,37.64 14.38,36.75 16.39,36.75 17.28,37.64 21.66,37.64 25.02,40.99 29.58,40.99 30.48,41.89 33.15,41.89 33.45,41.59 33.45,38.95 33.67,38.73 34.02,38.73 35.72,37.04 37.68,37.04 37.96,36.76 37.96,35.82 38.41,35.37 41.49,35.37 43.26,37.14 50.15,37.14 50.4,37.39 50.4,46.16 49.84,46.72 49.41,46.72 48.57,47.56 48.57,50.13 49.07,50.63 48.57,51.14 48.57,59.07 47.8,59.85 46.83,59.85 45.53,59.85 44.41,60.98 43.82,60.98 42.69,60.98 42.62,61.05 42.62,64.16
GND_FIELD SIGNAL on L2: 42.58,64.36 43.67,64.36 43.67,64.35 44.29,63.74 48.34,63.74 49.07,63.01 49.07,61.96 50.3,60.73 50.3,49.28 50.53,49.28 50.59,49.22 52.42,49.22 52.83,48.82 52.83,41.5 52.8,41.5 52.8,34.76 52.4,34.36 33.06,34.36 32.45,34.96 32.19,35.78 27.5,40.15 22.81,35.78 22.55,34.96 21.94,34.36 3.5,34.36 2.91,34.96 2.91,48.84 3.35,49.28 4.7,49.28 4.7,60.66 5.37,61.33 5.37,62.09 5.51,62.36 5.97,62.83 5.97,63.29 6.07,63.48 6.79,64.2 15.22,64.2 17.4,62.02 17.4,50.94 16.29,49.82 13.64,49.82 12.96,49.13 12.96,47.58 12.76,47.37 8.2,47.37 7.82,46.99 7.82,44.38 7.88,44.31 7.88,41.99 8.56,41.32 12.17,41.32 12.42,41.07 12.42,38.09 13.27,37.23 13.87,37.23 14.37,36.74 16.4,36.74 17.13,37.47 21.67,37.47 25.09,40.88 33.44,40.88 33.44,40.87 33.67,40.65 33.67,40 33.67,40 33.67,39.89 34.57,38.99 35.58,38.99 38.71,35.86 38.71,35.61 38.83,35.49 40.32,35.49 40.42,35.6 41.47,35.6 41.74,35.87 41.74,37.75 41.74,37.76 41.74,38.19 41.95,38.4 44.33,38.4 44.69,38.04 44.69,37.52 44.78,37.43 48.05,37.43 48.38,37.76 48.38,38.35 48.35,38.38 48.35,38.39 48.72,38.76 49.69,38.76 50.37,39.45 50.37,45.76 48.91,47.23 48.23,47.23 48.16,47.31 48.16,48.01 47.84,48.33 44.81,48.33 44.81,48.32 43.81,48.32 43.71,48.23 43.71,47.35 43.63,47.27 42.11,47.27 42.03,47.35 42.03,49.45 42.29,49.71 48.2,49.71 48.5,50.01 48.5,59.48 48.16,59.82 45.55,59.82 45.54,59.81 44.44,60.91 44.44,60.92 44.29,61.06 42.46,61.06 42.46,64.23
GND_FIELD SIGNAL on L5: 42.58,64.36 47.72,64.36 49.07,63.01 49.07,61.96 50.3,60.73 50.3,49.28 50.53,49.28 50.59,49.22 52.42,49.22 52.83,48.82 52.83,41.5 52.8,41.5 52.8,34.76 52.4,34.36 33.06,34.36 32.45,34.96 32.19,35.78 27.5,40.15 22.81,35.78 22.55,34.96 21.94,34.36 3.5,34.36 2.91,34.96 2.91,48.84 3.35,49.28 4.7,49.28 4.7,60.66 5.37,61.33 5.37,62.09 5.51,62.36 5.97,62.83 5.97,63.29 6.07,63.48 6.79,64.2 15.22,64.2 17.4,62.02 17.4,50.94 15.99,49.52 13.69,49.52 13.25,49.08 13.25,47.26 12.87,46.88 8.07,46.88 7.82,46.63 7.82,44.38 7.88,44.31 7.88,41.99 8.35,41.52 12.51,41.52 12.98,41.05 12.98,37.52 13.27,37.23 13.87,37.23 14.37,36.74 16.4,36.74 17.25,37.58 21.63,37.58 25.02,40.98 33.6,40.98 33.75,40.83 33.75,40.05 34.77,39.02 35.64,39.02 37.7,36.96 37.93,36.95 38.07,36.95 38.09,36.9 38.71,36.28 38.71,35.74 38.85,35.6 41.47,35.6 41.74,35.87 41.74,37.75 41.74,37.76 41.74,38.19 41.95,38.4 44.33,38.4 44.69,38.04 44.69,37.52 44.78,37.43 48.05,37.43 48.38,37.76 48.38,38.35 48.35,38.38 48.35,38.39 48.72,38.76 49.69,38.76 50.37,39.45 50.37,45.76 48.91,47.23 48.23,47.23 48.16,47.31 48.16,48.01 47.84,48.33 44.81,48.33 43.84,47.36 43.84,47.19 43.73,47.08 42.23,47.08 42.03,47.28 42.03,49.45 42.29,49.71 48.2,49.71 48.5,50.01 48.5,59.48 48.16,59.82 45.55,59.82 45.54,59.81 44.44,60.91 44.44,60.92 44.29,61.06 42.46,61.06 42.46,64.23
GND_SIGNAL on TOP: 31.07,56.87 30.05,56.87 29.74,57.19 28.64,57.19 28.03,56.58 28.03,55.3 28.36,54.97 30.21,54.97 30.41,55.16 43.56,55.16 44.7,56.31 44.7,59.44 44.09,60.04 41.46,60.04 40.89,59.47 40.89,57.02 40.42,56.55 31.4,56.55
GND_SIGNAL on BOTTOM: 41.59,56.33 47.9,56.33 48.21,56.63 48.21,59.13 47.84,59.49 44.58,59.49 44.01,60.07 41.66,60.07 41.41,60.33 38.79,60.33 38.61,60.15 38.61,59.27 38.78,59.1 40.61,59.1 41.06,58.65 41.06,56.86
GND_SIGNAL on BOTTOM: 28.72,59.37 30.6,59.37 30.88,59.1 30.88,55.23 30.73,55.08 28.69,55.08 28.46,55.31 28.46,59.11
GND_SIGNAL on L2, L5: 41.41,60.65 43.99,60.65 44.22,60.42 44.22,60.4 45.17,59.45 47.84,59.45 48.4,58.89 48.4,51.6 48.06,51.26 48.06,50.68 47.62,50.24 47.61,50.26 42.29,50.26 41.62,49.59 41.62,43.6 41.63,43.58 45.79,43.58 46.07,43.3 46.07,41.33 46.06,41.32 46.06,39.69 45.6,39.23 42.89,39.23 42.83,39.29 42.83,40.24 42.4,40.67 42.41,40.68 41.39,40.68 41.38,40.66 40.19,40.66 39.8,41.06 39.8,50.44 40.3,50.95 40.3,50.95 41.26,51.9 41.26,57.29 40.98,57.56 40.98,60.22
VCC_IN on BOTTOM: 44.97,54.79 47.55,54.79 48.05,54.28 48.05,50.39 47.9,50.24 42.26,50.24 41.99,49.98 41.51,49.5 41.51,47.03 41.25,46.76 35.97,46.76 35.58,47.15 35.58,49.02 35.85,49.29 39.2,49.29 39.51,49.6 39.51,50.18 40.51,51.18 40.51,51.22 41.28,51.99 42.17,51.99 42.56,52.39 42.89,52.72 43.5,53.32
VCC_IN on L4: 42.12,40.96 43.44,40.96 44.08,41.6 44.08,42.83 43.67,43.24 42.79,43.24 42.46,43.58 42.46,45.29 44.4,47.23 44.4,48.74 45.27,49.61 48.71,49.61 49.14,50.04 49.14,54.04 48.36,54.82 44.27,54.82 43.63,54.18 43.63,50.25 40.8,47.42 40.8,42.99 41.76,42.04 41.76,41.32
VCC_IN1 on TOP: 30.94,62.9 32.79,62.9 33.17,62.51 33.17,60.53 33.95,59.75 35.57,59.75 36.04,59.29 36.04,57.49 35.64,57.1 33.82,57.1 33.58,57.34 33.58,58.11 32.6,59.09 31.25,59.09 30.9,59.43 30.9,59.44 30.87,59.47 30.12,59.47 30.04,59.55 30.04,60.7 30.26,60.92 30.46,60.92 30.69,61.14 30.69,62.65
VCC_IN1 on TOP: 24.72,51.29 23.55,51.29 23.37,51.12 23.37,48.15 23.66,47.86 23.66,46.72 23.84,46.55 25.67,46.55 26.01,46.88 26.01,48.75 26.38,49.12 27.55,49.12 27.74,49.31 27.74,49.95 27.84,50.05 28.57,50.05 28.76,50.23 28.76,50.91 28.66,51.01 25.01,51.01
VCC_IN1 on BOTTOM: 29.09,50.29 34.33,50.29 34.59,50.03 34.59,49.27 34.35,49.02 28.18,49.02 27.78,49.43 27.78,50.78 27.9,50.9 28.55,50.9 28.65,50.8 28.8,50.8 28.92,50.68 28.92,50.46
VCC_IN1 on L4: 37.35,58.62 39.32,58.62 39.49,58.46 39.98,58.46 41.11,57.33 41.11,52.14 39.56,50.58 39.56,40.73 39.86,40.38 40.16,40.09 42.04,40.09 42.43,39.7 42.43,38.77 42.31,38.65 40.59,38.65 40.31,38.36 40.31,35.86 40.13,35.68 39.09,35.68 38.92,35.85 38.92,36.76 38.5,37.19 37.75,37.19 35.75,39.19 34.89,39.19 33.93,40.14 33.93,41.08 33.73,41.29 24.88,41.29 21.4,37.8 16.68,37.8 16.15,37.27 14.47,37.27 14.19,37.55 13.52,37.55 12.98,38.09 12.98,41.61 12.77,41.83 8.93,41.83 8.38,42.37 8.38,44.87 7.9,45.35 7.9,46.57 7.97,46.64 12.87,46.64 13.45,47.22 13.45,48.77 14.04,49.36 21.41,49.36 21.75,49.7 21.75,62.71 23.53,64.49 33.66,64.49 33.88,64.27 33.88,62.67 34.13,62.41 34.62,62.41 34.63,62.43 34.71,62.35 34.71,59.19 35.28,58.61 37.34,58.61 ; 1 cut-out
VCC_ON on BOTTOM: 36.02,53.42 41.25,53.42 41.66,53.83 41.66,55.58 41.24,56.01 38.59,56.01 38.35,56.25 38.35,58.55 37.94,58.96 37.8,58.96 37.62,59.14 37.62,60.24 37.46,60.39 36.29,60.39 36.03,60.13 36.03,57.48 35.63,57.08 33.75,57.08 33.59,57.24 33.59,58.59 33.24,58.94 33.18,59.01 31.71,59.01 31.49,58.78 31.49,55.77 31.91,55.34 35.32,55.34 35.67,54.99 35.67,53.8 35.65,53.79
N20143445 on TOP: 10.6,52.22 9.47,52.22 9.35,52.11 9.35,50.47 9.58,50.24 10.71,50.24 10.99,50.51 10.99,51.84
N20143445 on BOTTOM: 9.47,53.67 11.54,53.67 11.74,53.47 11.74,51 11.38,50.64 11.08,50.64 10.99,50.55 10.99,50.4 10.85,50.26 9.54,50.26 9.35,50.44 9.35,53.55
N20299843 on TOP: 10.75,60 11.5,60 11.68,59.82 11.68,59.05 11.48,58.85 11.2,58.85 11.1,58.75 11.1,58.28 10.96,58.13 10.03,58.13 9.88,58.28 9.88,59.42 9.95,59.49 10.24,59.49
N20299843 on BOTTOM: 9.65,59.28 10.06,59.28 10.73,59.95 11.44,59.95 11.67,59.73 11.67,56.39 11.43,56.15 9.42,56.15 9.22,56.36 9.22,58.85
N20727277 on TOP: 7.75,57.1 7.65,57.1 7.41,56.86 7.41,53.93 7.77,53.56 10.5,53.56 10.86,53.92 10.86,55.98 10.64,56.19 9.35,56.19 9.17,56.37 9.17,56.93 8.98,57.13 7.77,57.13
N20727277 on BOTTOM: 9.02,56.16 8.32,56.16 7.94,55.78 7.94,54.02 8.14,53.82 10.6,53.82 10.88,54.1 10.88,55.83 10.7,56.02 9.41,56.02 9.17,56.02
N20773616 on TOP: 36.41,62.96 40.36,62.96 40.49,63.09 40.49,64.34 40.31,64.52 34.15,64.52 33.54,63.91 33.54,60.49 34,60.03 35.55,60.03 36.06,60.55 36.06,62.61
N20773616 on BOTTOM: 40.54,62.7 41.77,62.7 41.95,62.87 41.95,64.48 41.84,64.59 39.41,64.59 39.25,64.43 39.25,63.13 39.36,63.03 40.27,63.03 40.33,62.96 40.33,62.9
N20773616 on BOTTOM: 32.38,62.59 35.93,62.59 36.14,62.8 37.65,62.8 37.81,62.64 37.81,61.88 37.82,61.88 37.82,61.19 37.52,60.89 36.31,60.89 36.27,60.85 36.03,60.85 35.91,60.74 35.91,60.22 35.79,60.1 33.99,60.1 33.87,60.22 33.87,60.24 33.62,60.5 32.14,60.5 32.03,60.61 32.03,62.24
N20773758 on BOTTOM: 38.76,60.59 41.67,60.59 41.92,60.84 41.92,62.23 41.68,62.48 40.46,62.48 40.15,62.79 39.33,62.79 38.69,63.43 38.69,64.24 38.33,64.6 32.23,64.6 32.06,64.42 32.06,62.97 32.37,62.65 32.89,62.65 32.9,62.66 33.98,62.66 34,62.65 34.17,62.65 34.46,62.94 35.86,62.94 36.05,63.13 37.71,63.13 38.25,62.59 38.25,61.11
N20839386 on TOP: 25.5,62.54 29.9,62.54 30.34,62.1 30.34,61.63 29.73,61.02 28.78,61.02 28.18,60.43 25.48,60.43 24.81,61.1 24.81,61.85
N20839386 on BOTTOM: 25.22,62.27 31.5,62.27 31.74,62.03 31.74,60.56 31.58,60.41 25.51,60.41 24.82,61.09 24.82,61.87

## Text on the board
Ref Des/Silkscreen Bottom: 1 | BOT | CFS250202030YLL2001A/1
Ref Des/Assembly Top: 1
Ref Des/Silkscreen Top: 1 | 28 | A | CFS250202030YLL2001A/1 | TOP
DIMENSION: V-CUT
User.28: FIGURE | FINISHED_SIZE | 8.0 | 11.81 | 12.0 | 16.0 | 19.69 | 23.62 | 35.43 | 86.61 | DRILL CHART: TOP to BOTTOM | ALL UNITS ARE IN MILS | TOLERANCE_DRILL | +0.0/-0.0 | +2.99/-2.99 | PLATED | QTY | 1 | 71 | 9 | 34 | 3 | 28 | 20
